# Altium PCB Porsche Brake Light.PcbDoc
Units mm, origin at the board's own origin, x right, y up, seen from the top; angles counter-clockwise.
Board outline 63 x 70 mm, 2 copper layers (Top Layer, Bottom Layer); 23 components, 14 nets, 98 pads, 42 vias.
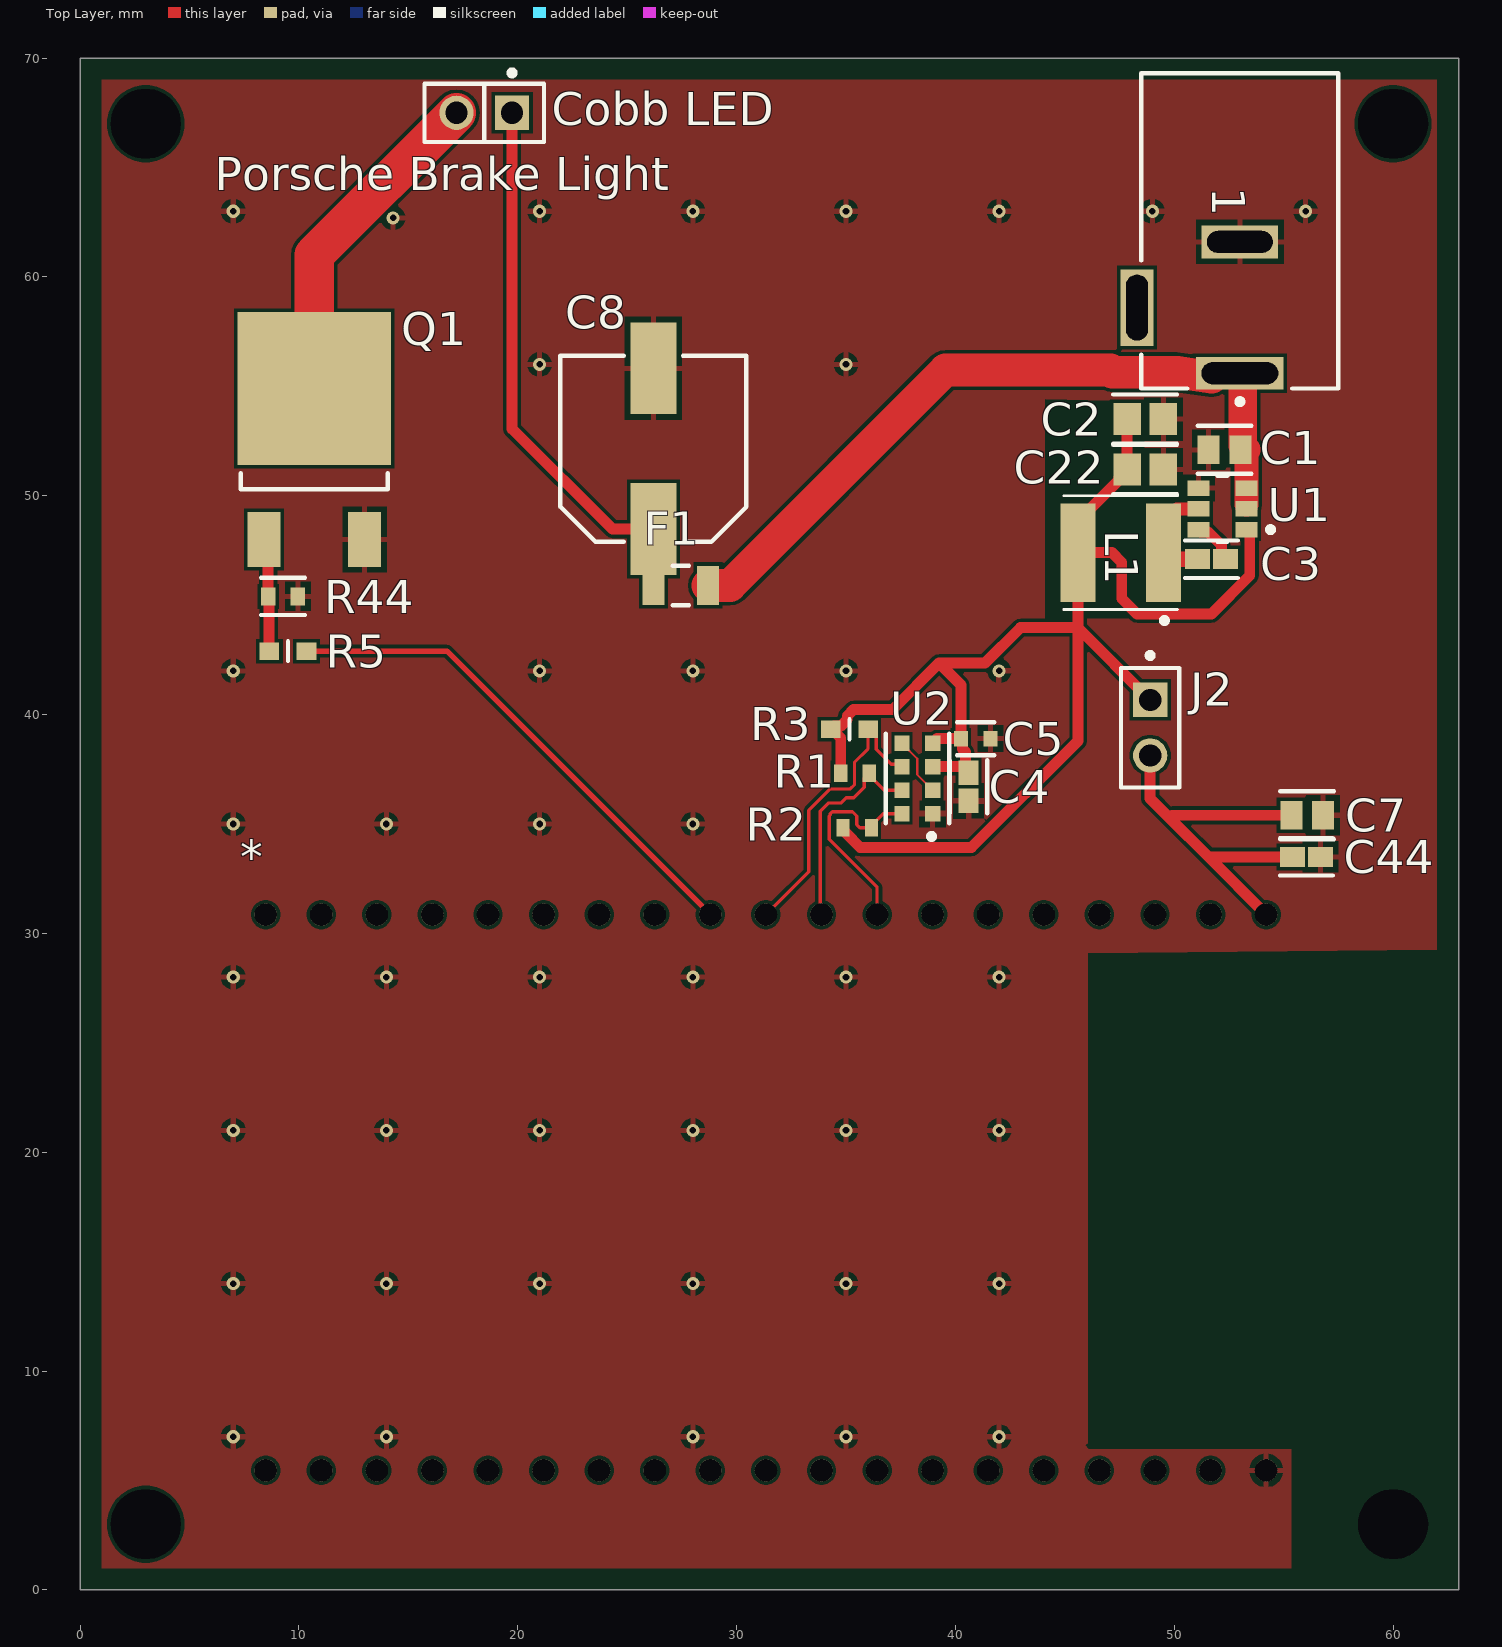
[diagram p0: Top Layer view]
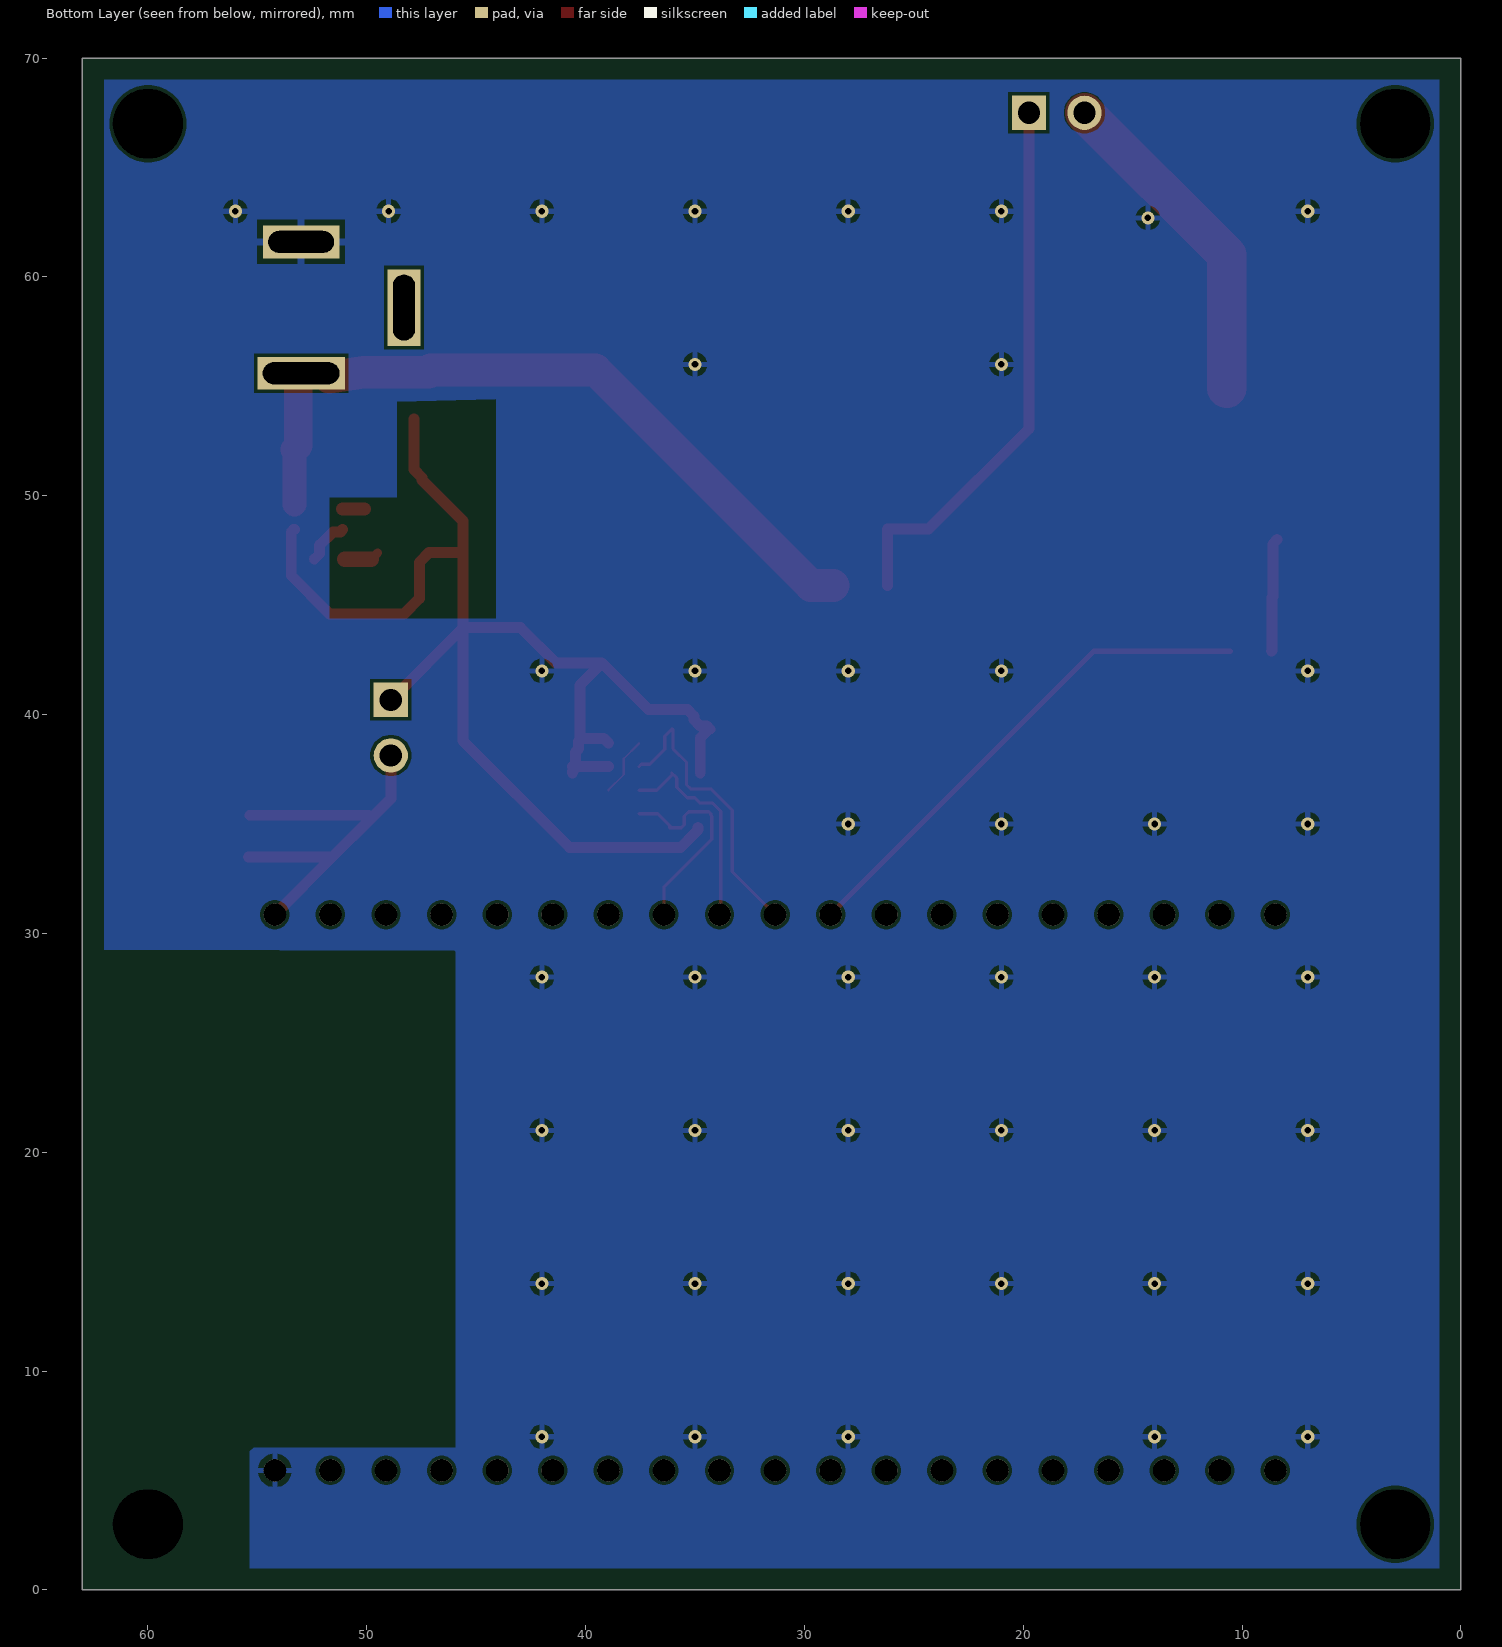
[diagram p1: Bottom Layer view, seen from below]
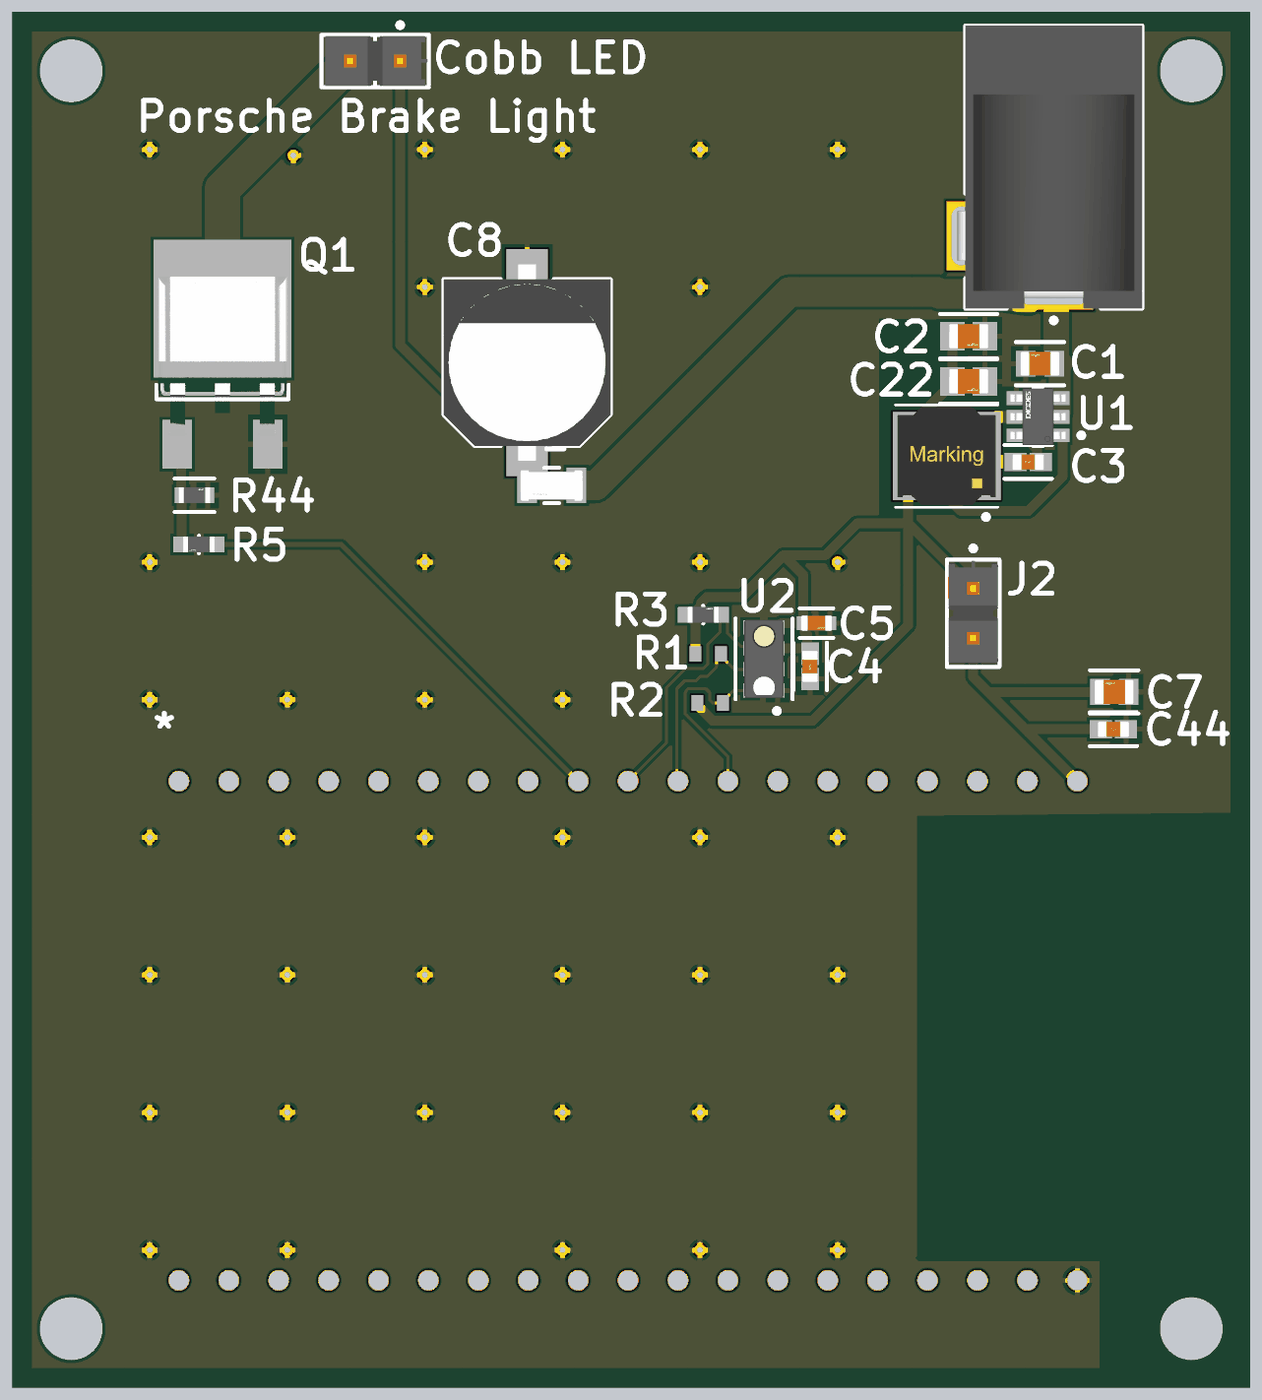
[diagram p2: 3D render of the assembled board from above, using the file's embedded part models]

## Layer stack, top to bottom
Top Solder: solder mask 0.0102, Solder Resist, Dk 3.5
Top Layer: signal copper 0.0356
Dielectric 1: dielectric 0.32, FR-4, Dk 4.8
Bottom Layer: signal copper 0.0356
Bottom Solder: solder mask 0.0102, Solder Resist, Dk 3.5

## Board outline
0,0 0,70 63,70 63,0

## Design rules (kind name [scope] priority, off if disabled: settings)
Clearance [All] p1: gap=0.15 ignorepadtopadclearanceinfootprint=FALSE
PolygonConnect [All] p1: connectstyle=Relief reliefconductorwidth=0.254 reliefentries=4 polygonreliefangle="90 Angle" airgapwidth=0.254
RoutingVias [All] p1: holewidth=0.711 width=1.27 viastyle="Through Hole" minholewidth=0.711 minwidth=1.27 maxholewidth=0.711 maxwidth=1.27
SolderMaskExpansion [All] p1: expansion=0.102 istentingtop=FALSE
SupplyNets "Schematic Supply Nets_2" [InNet('GND')] p1: voltage=0.000
SupplyNets "Schematic Supply Nets_1" [InNet('+12V')] p2: voltage=0.000
SupplyNets "Schematic Supply Nets" [InNet('+3.3V')] p3: voltage=0.000
Width "VCNL Pin 8" [InNet('NetMD1_27')] p1: maxlimit=0.25 minlimit=0.15 preferedwidth=0.2
Width "VNCL Pin 7" [InNet('NetMD1_33')] p2: maxlimit=0.25 minlimit=0.15 preferedwidth=0.2
Width "VCNL Pin 6" [InNet('NetMD1_36')] p3: maxlimit=0.25 minlimit=0.15 preferedwidth=0.2
Width VIN [InNet('+12V')] p4: maxlimit=1.5 minlimit=0.5 preferedwidth=0.8
Width VOUT [InNet('+3.3V')] p5: maxlimit=1.5 minlimit=0.5 preferedwidth=1
Width "SW node" [InNet('NetC3_1')] p6: maxlimit=1 minlimit=0.4 preferedwidth=0.6
30 further rules are at their usual default settings.

## Components (designator, comment, footprint, x,y, rotation, side; value= is the part's Value field where it differs from the comment)
1 "PJ-002A" CUI-PJ-002A_V 53,58.6 r90 top
* "ESP32-DEVKITC-VIE" ESP32-DEVKITC-VIE-Footprint-1 7.19,32.13 r270 top
C1 "GRM21BR61E106KA73L" FP-GRM21B-0_15-IPC_C 52.3,52.1 r180 top
C2 "GRM21BZ71A226ME15L" FP-GRM21B-0_2-e0_2_0_7-IPC_B 48.674,53.5 r0 top
C3 "C1608X7R1E104K080AA" FP-C1608-080-0_1-IPC_B 51.7,47.1 r0 top
C4 "C1608X7R1E104K080AA" FP-C1608-080-0_1-IPC_B 40.6,36.7 r90 top
C5 "GRM188R71A225KE15D" FP-GRM188-0_1-e0_2_0_5-MFG 40.925,38.9 r0 top
C7 "GRM21BR61E106KA73L" FP-GRM21B-0_15-IPC_C 56.074,35.4 r180 top
C8 "EEE-FK1E221P" PNSC-EEE-FK1E221P_N 26.2,52.15 r90 top
C22 "GRM21BZ71A226ME15L" FP-GRM21B-0_2-e0_2_0_7-IPC_B 48.674,51.2 r0 top
C44 "C1608X7R1E104K080AA" FP-C1608-080-0_1-IPC_B 56.041,33.5 r0 top
"Cobb LED" "TSW-102-14-G-S" FP-TSW-102-14-G-S-MFG 18.47,67.5 r180 top
F1 "TR/3216FF2-R" FP-3216FF-MFG 27.45,45.9 r180 top value=0.066Ω
J2 "TSW-102-07-G-S" FP-TSW-102-07-G-S-MFG 48.9,39.4 r270 top
L1 "74404052039" WE-LQS_5020 47.55,47.4 r0 top
Q1 "IRLR7843TRPBF" FP-PG-TO252-3-MFG 10.7,52.575 r0 top
R1 "RC0603FR-072K2L" RESC1608X55X25LL10T15 35.41,37.33 r0 top
R2 "RC0603FR-072K2L" RESC1608X55X25LL10T15 35.51,34.83 r0 top
R3 "RC0603FR-078K2L" FP-RC0603-0_55-MFG 35.16,39.33 r0 top
R5 "RC0603FR-07100RL" FP-RC0603-0_55-MFG 9.5,42.9 r180 top
R44 "RC0603FR-0710KL" FP-RC0603-0_55-IPC_C 9.273,45.4 r0 top
U1 "AP63203WU-7" FP-TSOT26-MFG 52.2,49.4 r180 top
U2 "VCNL4040M3OE" FP-VCNL4040M3OE-MFG 38.26,37.08 r0 top

## Footprints (in the part's own frame and the unit in brackets; to place one, negate y for a bottom-side part, rotate by r counter-clockwise, add the part's x,y. Pads: shape width x height; smd on the part's side, far side on the other; paste and mask are expansions set on the pad)
CUI-PJ-002A_V [mm] "THD, 3-Leads, Body 14.4x9mm, Height 11mm"
  rect 1.5x4 hole 1 slot 3.5 at 90 deg: 1(-3,0)
  rect 1.5x3.5 hole 1 slot 3 at 90 deg: 2(3,0)
  rect 3.5x1.5 hole 1 slot 3 at 0 deg: 3(0,4.7)
  silkscreen extent -4.42,-4.5 10.7,4.5, body extent -3.7,-4.5 10.7,4.9, height 11
ESP32-DEVKITC-VIE-Footprint-1 [mm]
  round 1.02 hole 1.02: 1(1.27,47.01) 2(1.27,44.47) 3(1.27,41.93) 4(1.27,39.39) 5(1.27,36.85) 6(1.27,34.31) 7(1.27,31.77) 8(1.27,29.23) 9(1.27,26.69) 10(1.27,24.15) 11(1.27,21.61) 12(1.27,19.07) 13(1.27,16.53) 14(1.27,13.99) 15(1.27,11.45) 16(1.27,8.91) 17(1.27,6.37) 18(1.27,3.83) 19(1.27,1.29) 20(26.67,47.01) 21(26.67,44.47) 22(26.67,41.93) 23(26.67,39.39) 24(26.67,36.85) 25(26.67,34.31) 26(26.67,31.77) 27(26.67,29.23) 28(26.67,26.69) 29(26.67,24.15) 30(26.67,21.61) 31(26.67,19.07) 32(26.67,16.53) 33(26.67,13.99) 34(26.67,11.45) 35(26.67,8.91) 36(26.67,6.37) 37(26.67,3.83) 38(26.67,1.29)
  body extent 0,0 27.94,48.26, height 15
FP-3216FF-MFG [mm]
  rect 1x1.8 smd paste+0 mask+0: 1(-1.25,0) 2(1.25,0)
  silkscreen extent -0.38,-0.9 0.37,0.9, body extent -1.85,-1 1.85,1, height 0.25
FP-C1608-080-0_1-IPC_B [mm]
  rect 1.131x0.912 smd paste+0 mask+0: 1(-0.641,0) 2(0.641,0)
  silkscreen extent -1.21,-0.86 1.21,0.86, body extent -1.46,-0.71 1.46,0.71, height 0.25
FP-GRM21B-0_2-e0_2_0_7-IPC_B [mm]
  rect 1.255x1.456 smd paste+0 mask+0: 1(-0.826,0) 2(0.826,0)
  silkscreen extent -1.45,-1.13 1.45,1.13, body extent -1.7,-0.98 1.7,0.98, height 0.25
FP-GRM21B-0_15-IPC_C [mm]
  rect 1.006x1.308 smd paste+0 mask+0: 1(-0.726,0) 2(0.726,0)
  silkscreen extent -1.23,-1.1 1.23,1.1, body extent -1.33,-0.8 1.33,0.8, height 0.25
FP-GRM188-0_1-e0_2_0_5-MFG [mm]
  rect 0.65x0.7 smd paste+0 mask+0: 1(-0.675,0) 2(0.675,0)
  silkscreen extent -0.85,-0.75 0.85,0.75, body extent -1.1,-0.55 1.1,0.55, height 0.25
FP-PG-TO252-3-MFG [mm]
  rect 1.5x2.5 smd paste+0 mask+0: 1(-2.3,-4.575) 3(2.3,-4.575)
  rect 7x7 smd paste+0 mask+0: 4(0,2.325)
  silkscreen extent -3.37,-2.29 3.36,-1.55, body extent -3.6,-5.92 3.6,5.92, height 0.25
FP-RC0603-0_55-IPC_C [mm]
  rect 0.659x0.812 smd paste+0 mask+0: 1(-0.677,0) 2(0.677,0)
  silkscreen extent -1.01,-0.85 1.01,0.85, body extent -1.11,-0.55 1.11,0.55, height 0.25
FP-RC0603-0_55-MFG [mm]
  rect 0.9x0.8 smd paste+0 mask+0: 1(-0.85,0) 2(0.85,0)
  silkscreen extent 0,-0.45 0,0.45, body extent -1.4,-0.55 1.4,0.55, height 0.25
FP-TSOT26-MFG [mm]
  rect 1x0.7 smd paste+0 mask+0: 1(-1.1,0.95) 2(-1.1,0) 3(-1.1,-0.95) 4(1.1,-0.95) 5(1.1,0) 6(1.1,0.95)
  silkscreen extent -2.33,-1.5 0.22,1.5, body extent -1.7,-1.6 1.7,1.6, height 0.25
FP-TSW-102-07-G-S-MFG [mm]
  rect 1.57x1.57 hole 1.02 paste-2539.97 mask+0: 1(-1.27,0)
  round 1.57 hole 1.02 paste-2539.97 mask+0: 2(1.27,0)
  silkscreen extent -3.42,-1.34 2.73,1.34, body extent -2.83,-1.44 2.83,1.44, height 0.25
FP-TSW-102-14-G-S-MFG [mm]
  rect 1.57x1.57 hole 1.02 paste-2539.97 mask+0: 1(-1.27,0)
  round 1.57 hole 1.02 paste-2539.97 mask+0: 2(1.27,0)
  silkscreen extent -2.73,-1.95 2.73,1.34, body extent -2.83,-1.44 2.83,1.44, height 0.25
FP-VCNL4040M3OE-MFG [mm]
  rect 0.7x0.725 smd paste+0 mask+0: 1(0.7,-1.612) 2(0.7,-0.538) 3(0.7,0.538) 4(0.7,1.613) 5(-0.7,1.613) 6(-0.7,0.538) 7(-0.7,-0.538) 8(-0.7,-1.612)
  silkscreen extent -1.45,-2.77 1.45,2.05, body extent -1.15,-2.15 1.15,2.15, height 0.25
PNSC-EEE-FK1E221P_N [mm] "CAPAE, 2-Leads, Body 8.5x8.5mm, IPC Medium Density"
  rect 4.2x2.1 smd: 1(-3.675,0) 2(3.675,0)
  silkscreen extent -4.25,-4.25 4.25,4.25, body extent -5,-4.25 5,4.25, height 10.5
RESC1608X55X25LL10T15 [mm] "Chip Resistor, 2-Leads, Body 1.60x0.80mm, IPC High Density"
  rect 0.6x0.8 smd: 1(-0.65,0) 2(0.65,0)
  body extent -0.85,-0.45 0.85,0.45, height 0.55
WE-LQS_5020 [mm] "SMD Power Inductor, 2-Leads, body 5x5mm"
  rect 1.6x4.5 smd: 1(1.95,0) 2(-1.95,0)
  silkscreen extent -2.6,-3.22 2.6,2.6, body extent -2.5,-2.5 2.5,2.5, height 2

## Part data
1: library part CMP-2000-06895-2, "Through Hole Right Angle DC Power Jack, 2.5 A, 2 mm Center Pin, 3 Position, -25 to 85 degC, RoHS, Bulk", Current Rating=2.5A, Flammability Rating=UL94V-0, Insulation Resistance=50MOhms, Manufacturer=CUIInc., Operating Temperature Range=-25Cto+85C, Package Description="3-Pin Through Hole Device, Body 14.4 x 9 mm, Height 11 mm", Voltage Rating=24V, Brand=CUI, Connector Type=DCPowerJack, Contact Gender=Male, Contact Material=Copper, Contact Plating=Nickel, Datasheet URL=http://www.cui.com/product/resource/pj-002a.pdf, Datasheet Version="Rev. 1.03, 04/2016", Factory Pack Quantity=500, Housing Material=PolybutyleneTerephthalate(PBT), Inside Contact Diameter=2mm, Manufacturer URL=http://www.cui.com/, Mounting Angle=Right, Mounting Style=ThroughHole, Mounting Technology=ThroughHole, Outside Contact Diameter=6.5mm, Package Reference=PJ-002A, Product=Jacks, Product Category=DCPowerConnectors, RoHS=True, Termination Style=ThroughHole
*: library part CMP-00025-00003-3, "ESP32-WROVER-IE Series Evaluation Board 802.11 b/g/n (WiFi, WLAN) Bluetooth Smart Ready 4.x Dual Mode"
C1 C7: library part CMP-2007-03541-2, "Chip Multilayer Ceramic Capacitors for General Purpose, 0805, 10uF, X5R, 15%, 10%, 25V", Capacitance=10uF, Case Code (Imperial)=0805, Case Code (Metric)=2012, Dielectric=X5R, Max Operating Temperature=85°C, Min Operating Temperature=-55°C, Package Quantity=1, Tolerance=10%, Voltage=25V, Case/Package=0805, Depth=1.25mm, Height=1.25mm, Lead Free="Lead Free", Length=2mm, Material=Ceramic, Mount="Surface Mount", Packaging="Tape and Reel", Radiation Hardening=No, Termination=SMD/SMT, Thickness=0.053inch, Voltage Rating=25V, Voltage Rating (DC)=25V, Width=0.049inch
C2 C22: library part CMP-06035-023072-1, "Chip Multilayer Ceramic Capacitors for General Purpose, 0805, 22uF, X7R, 15%, 20%, 10V"
C3 C4 C44: library part CMP-2000-05395-2, "Multilayer Ceramic Capacitors 100nF ±10% 25V X7R SMD 0603", Capacitance=100nF, Case Code (Imperial)=0603, Case Code (Metric)=1608, Dielectric=X7R, Dielectric Material=Ceramic, Max Operating Temperature=125°C, Min Operating Temperature=-55°C, Package Quantity=1, Tolerance=10%, Voltage=25V, Case/Package=0603, Construction=Flat, Depth=0.8mm, Height=0.8mm, Lead Free="Lead Free", Length=1.6mm, Mount="Surface Mount", Number of Pins=2, Packaging="Tape and Reel", Radiation Hardening=No, REACH SVHC="No SVHC", Resistor Type=Ceramic, RoHS Compliant=Yes, Series=C, Termination=SMD/SMT, Thickness=0.037inch, Voltage Rating=25V, Voltage Rating (DC)=25V, Weight=7.1E-05oz, Width=0.031inch
C5: library part CMP-2006-02836-2, "Chip Multilayer Ceramic Capacitors for General Purpose, 0603, 2.2uF, X7R, 15%, 10%, 10V", Capacitance=2.2uF, Case Code (Imperial)=0603, Case Code (Metric)=1608, Dielectric=X7R, Max Operating Temperature=125°C, Min Operating Temperature=-55°C, Package Quantity=1, Tolerance=10%, Voltage=10V, Case/Package=0603, Depth=0.8mm, Height=0.8mm, Lead Free="Lead Free", Length=1.6mm, Material=Ceramic, Mount="Surface Mount", Number of Pins=2, Packaging="Cut Tape", REACH SVHC="No SVHC", Termination=SMD/SMT, Thickness=0.035inch, Voltage Rating=10V, Voltage Rating (DC)=10V, Weight=7.1E-05oz, Width=0.031inch
C8: library part CMP-1665-00017-3, "Aluminum Electrolytic Capacitor, 220 uF, +/- 20%, 25 V, -55 to 105 degC, 2-Pin CAPAE, RoHS, Tape and Reel", Manufacturer=Panasonic, Max Operating Temperature="105 degC", Min Operating Temperature="-55 degC", Package Quantity=500, Voltage Rating="25 V", ComponentLink1Description="Manufacturer URL", ComponentLink1URL=http://www.panasonic.com/, ComponentLink2Description=Datasheet, ComponentLink2URL=http://industrial.panasonic.com/cdbs/www-data/pdf/RDE0000/ABA0000C1181.pdf, DatasheetVersion=03/2016, Height="10.2 mm", Lead Pitch="3.1 mm", Length="10.2 mm", Mount="Surface Mount", Mounting Technology="Surface Mount", PackageDescription="2-Pin Electrolytic Aluminum Capacitor, Body 8.3 x 8.3 mm", PackageReference=EEE-FK1E221P, Packaging="Tape and Reel", Pins=2, REACH SVHC="No SVHC", RoHSCompliant=true
"Cobb LED": library part CMP-02766-001740-1, "CONN HEADER VERT 2POS 2.54MM", Color=Black, Flammability Rating="UL94 V-0", Max Current Rating=7.6A, Max Operating Temperature=125°C, Max Voltage Rating (AC)=550V, Min Operating Temperature=-55°C, Package Quantity=1, Connector Type=Header, Contact Finish - Mating=GOLD, Contact Material=Bronze, Contact Mating Length=0.32inch, Contact Plating=Gold, Contact Shape=Square, Contact Type="Male Pin", Depth=2.54mm, Fastening Type=Pull, Gender=Male, Housing Color=Black, Housing Material=Polyester, Insulation Color=Black, Insulation Material=PBT, Lead Free="Lead Free", Length=5.08mm, Mount="Through Hole", Number of Contacts=2, Number of Positions=2, Number of Rows=1, Orientation=Straight, Packaging=Bulk, Pitch=2.54mm, Radiation Hardening=No, REACH SVHC="No SVHC", RoHS Compliant=Yes, Series=TSW, Termination=Solder, Width=2.54mm
F1: library part CMP-31519-000001-1, "FUSE BRD MNT 2A 32VAC 63VDC 1206", Fuse Current=2A, Fuse Interrupt Ac Current=50A, Manufacturer="Cooper Bussmann", Max Fuse Ac Voltage=32V, Max Fuse Dc Voltage=63V, Package=3216FF, Resistance=0.066Ω, Temperature="-55°C to +125°C", Temperature Range High=+125°C, Temperature Range Low=-55°C, Automotive=Yes, Automotive Grade="Grade 1", Category=Fuse, ComponentLink2Description=Datasheet, ComponentLink2URL=https://www.eaton.com/content/dam/eaton/products/electronic-components/resources/data-sheet/eaton-3216ff-surface-mount-fuse-data-sheet.pdf, Device Class L1="Circuit Protection", Device Class L2=Fuses, Device Class L3=unset, Digikey Description="FUSE BRD MNT 2A 32VAC 63VDC 1206", Fuse Blow Speed=Fast, Fuse I2T=0.126A2Sec, Fuse Interrupt Dc Current=50A, Height=1.09mm, Ipc Land Pattern Name=CAPC320160X89, Lead Free=Yes, Manufacturer Part Number=TR/3216FF2-R, Mouser Description="Surface Mount Fuses 32VAC/DC 2A Fast Acting Chip Fuse", Octopart=https://octopart.com/tr%2F3216ff2-r-cooper+bussmann-8723903, RoHS=TRUE
J2: library part CMP-02766-000084-1, "CONN HEADER VERT 2POS 2.54MM", Current Rating=6.3A, Manufacturer=Samtec, Temperature="-55°C to +125°C", Temperature Range High=+125°C, Temperature Range Low=-55°C, Voltage Rating=550V, Automotive=No, Category=Conn, ComponentLink2Description=Datasheet, ComponentLink2URL=http://suddendocs.samtec.com/catalog_english/tsw_th.pdf, Conn Gender=Male, Conn Orientation=Straight, Contact Material=Gold,Nickel, Device Class L1=Connectors, Device Class L2="Headers and Wire Housings", Device Class L3=unset, Digikey Description="CONN HEADER VERT 2POS 2.54MM", Footprint Url=http://suddendocs.samtec.com/prints/tsw-xxx-xx-x-x-xx-xxx-footprint.pdf, Height=8.71mm, Lead Free=Yes, Manufacturer Part Number=TSW-102-07-G-S, Mouser Description="Conn Unshrouded Header HDR 2 POS 2.54mm Solder ST Thru-Hole Automotive Bulk", Number of Contacts=2, Number of Rows=1, Octopart=https://octopart.com/tsw-102-07-g-s-samtec-272197, Package=TSW-102-07-G-S, Pitch=2.54mm, RoHS=TRUE
L1: library part CMP-03913-61645215-2, "Power Inductor, Aec-Q200, 3.9Uh, 2.4A Rohs Compliant: Yes", Ambient Temperature Range High=85°C, Ambient Temperature Range Low=-40°C, Case/Package=Nonstandard, Current Rating=2.4A, DC Resistance (DCR)=50.5mΩ, Inductance=3.9µH, Max Operating Temperature=125°C, Saturation Current=2.8A, Self Resonant Frequency=62MHz, Test Frequency=100kHz, Tolerance=30%, Composition=Wirewound, Height=2mm, Height - Seated (Max)=2.0066mm, Length=5mm, Min Operating Temperature=-40°C, Mount="Surface Mount", Packaging="Tape & Reel (TR)", RoHS=Compliant, Shielding=Shielded, Width=5mm
Q1: library part CMP-32901-000143-1, "MOSFET N-CH 30V 161A DPAK", Continuous Drain Current=161A, Drain To Source Breakdown Voltage=30V, Drain To Source Resistance=3.2mΩ, Gate To Source Voltage=20V, Input Capacitace At Vds="4380pF @ 15V", Manufacturer=Infineon, Max Forward Diode Voltage=1V, Max Junction Temp=+175°C, Package=PG-TO252-3, Power Dissipation=140W, Pulse Drain Current=620A, Temperature="-55°C to +175°C", Temperature Range Low=-55°C, Automotive=No, Category=Trans, ComponentLink2Description=Datasheet, ComponentLink2URL=https://www.infineon.com/dgdl/irlr7843pbf.pdf?fileId=5546d462533600a40153566de53526d8, Depletion Mode=False, Device Class L1="Discrete Semiconductors", Device Class L2=Transistors, Device Class L3=MOSFETs, Digikey Description="MOSFET N-CH 30V 161A DPAK", Drain To Source Voltage=30V, Footprint Url=https://www.infineon.com/cms/en/product/packages/PG-TO252/PG-TO252-3-901/, Gate Charge At Vgs="34nC @ 4.5V", Height=2.52mm, Lead Free=Yes, Manufacturer Part Number=IRLR7843TRPBF, Number Of Channels=1, Number Of N Channels=1, Octopart=https://octopart.com/irlr7843trpbf-infineon-65875062, Reverse Recovery Charge=36nC, Reverse Recovery Time=39ns, RoHS=TRUE, Rthja Max=50°C/W, Temperature Range High=+175°C, Threshold Vgs Max=2.3V, Threshold Vgs Min=1.4V, Turn Off Delay Time=34ns, Turn On Delay Time=25ns
R1 R2: library part CMP-2000-06934-1, "Thick Film Resistor, 2.2 KOhm, 100 mW, 50 V, +/- 1%, -55 to 155 degC, 2-Pin SMD (0603), RoHS, Tape and Reel", Case Code - in=0603, Case Code - mm=1608, Manufacturer=Yageo, Operating Temperature Range=-55Cto+155C, Package Description="2-Pin Surface Mount Device, Body 1.6 x 0.8 mm", Power Rating=100mW, Resistance=2.2kOhms, Temperature Coefficient=100PPM/C, Tolerance=1%, Voltage Rating=50V, Datasheet URL=http://www.yageo.com/documents/recent/PYu-RC_Group_51_RoHS_L_7.pdf, Datasheet Version="Rev. 7, 05/2017", Manufacturer URL=http://www.yageo.com/, Mounting Technology=SurfaceMount, Package Reference=0603, Packaging=Reel, Product=ThickFilmResistorsGeneralPurpose, Series=RC, Termination Style=SMD/SMT
R3: library part CMP-1659-00040-2, Case Code (Imperial)=0603, Case Code (Metric)=1608, Max Operating Temperature=155°C, Max Power Dissipation=100mW, Min Operating Temperature=-55°C, Resistance=8.2kΩ, Temperature Coefficient=100ppm/°C, Tolerance=1%, Voltage Rating=50V, Case/Package=0603, Composition="Thick Film", Depth=800µm, Features="Moisture Resistant", Height=450µm, Lead Free="Lead Free", Lead Pitch=300µm, Length=1.6mm, Military Standard=Not, NexarPartId=40301092, Number of Pins=2, Number of Terminations=2, Packaging="Tape & Reel", Power Rating=100mW, REACH SVHC="No SVHC", RoHS=Compliant, Schedule B="8533210045, 8533210045", Termination=SMD/SMT, Voltage Rating (AC)=50V, Voltage Rating (DC)=50V, Width=800µm
R5: library part CMP-2100-03663-2, Case Code (Imperial)=0603, Max Operating Temperature=155°C, Min Operating Temperature=-55°C, Power Rating=100mW, Resistance=100Ω, Temperature Coefficient=100ppm/°C, Tolerance=1%, Voltage Rating=50V, Case Code (Metric)=0603, Case/Package=0603, Composition="Thick Film", Depth=800µm, Height=450µm, Lead Free="Lead Free", Length=1.6mm, Military Standard=Not, NexarPartId=55402879, Number of Pins=2, Packaging="Tape & Reel", REACH SVHC=Unknown, RoHS=Compliant, Schedule B="8533210045, 8533210045", Termination=SMD/SMT, Voltage Rating (DC)=50V, Width=800µm
R44: library part CMP-2100-03664-2, "RES 10K OHM 1% 1/10W 0603", Case Code (Imperial)=0603, Case Code (Metric)=1608, Max Operating Temperature=155°C, Max Power Dissipation=100mW, Min Operating Temperature=-55°C, Resistance=10kR, Resistance Tolerance=1%, Resistor Type="Thick Film", Temperature Coefficient=100ppm/°C, Voltage Rating=75V, Voltage Rating (DC)=50V, Case/Package=0603, Construction=Rectangular, Depth=0.8mm, Features="Moisture Resistant", Height=0.45mm, Lead Free="Lead Free", Lead Pitch=0.3mm, Length=1.6mm, Military Standard=Not, Number of Pins=2, Number of Terminations=2, Packaging="Tape and Reel", Power Rating=100mW, RoHS Compliant=Yes, Series=RC, Size Code=0603, Termination=SMD/SMT, Tolerance=1%, Weight=7.1E-05oz, Width=0.8mm
U1: library part CMP-12757-000006-1, "IC REG BUCK 3.3V 2A TSOT26", Ambient Temperature Range High=+85°C, Ambient Temperature Range Low=-40°C, Manufacturer="Diodes Inc.", Max Junction Temp=+160°C, Max Supply Voltage=32V, Min Supply Voltage=3.8V, Nominal Supply Current=22uA, Output Current=2A, Output Voltage=3.3V, Package=TSOT26, Switching Frequency=1.1MHz, Temperature="to +160°C", Automotive=No, Category=IC, ComponentLink2Description=Datasheet, ComponentLink2URL=https://www.diodes.com/assets/Datasheets/AP63200-AP63201-AP63203-AP63205.pdf, Device Class L1="Integrated Circuits (ICs)", Device Class L2="Power Management ICs", Device Class L3="Voltage Regulators - Switching", Digikey Description="IC REG BUCK 3.3V 2A TSOT26", Footprint Url=https://www.diodes.com/assets/Package-Files/TSOT26.pdf, Height=1mm, Lead Free=Yes, Manufacturer Part Number=AP63203WU-7, Mouser Description="AP63203 Series 3.3 V 2 A SMT Fixed Low IQ Synchronous Buck - TSOT-26", Number Of Outputs=1, Octopart=https://octopart.com/ap63203wu-7-diodes+inc.-98099550, Output Type=Fixed, RoHS=TRUE, Standoff Height=0.01mm, Switching Topology=Buck, Temperature Range High=+160°C
U2: library part CMP-02530-000002-1, "SENSOR OPT 550NM AMBIENT 8SMD", Ambient Temperature Range High=+85°C, Ambient Temperature Range Low=-40°C, Manufacturer=Vishay, Max Supply Voltage=3.6V, Min Supply Voltage=2.5V, Operating Supply Current=0.2-300uA, Package=0, Temperature="-40°C to +85°C", Automotive=No, Category=IC, ComponentLink2Description=Datasheet, ComponentLink2URL=https://www.vishay.com/docs/84274/vcnl4040.pdf, Device Class L1=Sensors, Device Class L2="Optical Sensors", Device Class L3=unset, Digikey Description="SENSOR OPT 550NM AMBIENT 8SMD", Height=1.15mm, Lead Free=Yes, Manufacturer Part Number=VCNL4040M3OE, Octopart=https://octopart.com/vcnl4040m3oe-vishay-56243155, RoHS=TRUE, Sensor Output=I2C, Temperature Range High=+85°C, Temperature Range Low=-40°C

## Free pads (board coordinates)
  round 1.02 hole 3.2 unplated: 93(3,67) 93(60,67) 94(60,3) 95(3,3)

## Via types
v1: diameter 0.6, hole 0.3, Top Layer to Bottom Layer, 42 vias

## Nets (pads, with @x,y where several pads share a name; then routed paths per layer and width w, separated by ;. In a path a pad name is that pad's centre, name@x,y a point inside that pad or via, vN(x,y) a via of type N, cw(c..) or ccw(c..) an arc to the next point about the centre after c; other vN are vias at no path point)
+3.3V: C2.1 C4.2 C5.1 C22.1 J2.1 L1.2 R1.1 R2.1 R3.1 U1.1 U2.3 U2.4 | length 70.4
  Top Layer w0.5: R1.1 34.76,38.93 34.36,39.33 R3.1 34.46,39.48 34.763,39.48 35.056,39.773 35.056,39.939 35.351,40.234 37.134,40.234 39.25,42.35 ; R2.1 34.86,34.73 35.298,34.292 35.298,34.28 35.651,33.926 40.726,33.926 45.6,38.8 45.6,43.97 ; U2.3 40.394,37.618 40.6,37.411 C4.2 ; U2.4 38.96,38.705 39.155,38.9 C5.1 40.25,41.35 39.25,42.35 ; C5.1@40.25,38.875 40.325,38.8 40.325,38.428 40.465,38.288 40.465,37.656 40.504,37.618 C4.2@40.6,37.618 ; C2.1 C22.1 47.471,50.823 47.471,50.721 45.6,48.85 L1.2 ; J2.1 45.6,43.97 ; U1.1 53.35,48.45 53.45,48.35 53.45,46.35 51.7,44.6 48.3,44.6 47.6,45.3 47.6,46.95 47.15,47.4 L1.2 ; 39.25,42.35 41.36,42.35 42.98,43.97 45.6,43.97 ; 45.6,43.97 L1.2
+12V: 1.1 C1.1 F1.1 U1.2 U1.3 | length 33.2
  Top Layer w1.1: U1.2@53.3,49.6 U1.3 C1.1@53.3,52.096
  Top Layer w1.3: 47.226,55.646 47.326,55.746 ; 1.1 53.026,55.6 53.126,55.5 C1.1@53.126,52.274 ; C1.1@53.295,52.1 C1.1@53.3,52.096
  Top Layer w1.5: F1.1 29.7,45.9 39.546,55.746 47.084,55.746 47.184,55.646 47.226,55.646 50.147,55.646 1.1@51.7,55.415
GND: 1.2 *.20 C1.2 C2.2 C4.1 C5.2 C7.1 C8.2 C22.2 C44.2 Q1.3 R44.2 U1.4 U2.1
  other v1: 7,7 14,7 28,7 35,7 42,7 7,14 14,14 21,14 28,14 35,14 42,14 7,21 14,21 21,21 28,21 35,21 42,21 7,28 14,28 21,28 28,28 35,28 42,28 7,35 14,35 21,35 28,35 7,42 21,42 28,42 35,42 42,42 21,56 35,56 14.305,62.695 7,63 21,63 28,63 35,63 42,63 49,63 56,63
Net*_1: *.1 C7.2 C44.1 J2.2 | length 18.9
  Top Layer w0.5: J2.2 48.9,36.16 49.78,35.28 ; *.1 51.58,33.48 ; C7.2 49.9,35.4 49.78,35.28 ; C44.1 51.6,33.5 51.58,33.48 ; 49.78,35.28 51.58,33.48
Net*_8: *.8 R2.2 U2.8 | length 9.7
  Top Layer w0.15: *.8 36.42,32.105 34.231,34.294 34.231,35.366 34.284,35.419 34.284,35.464 34.379,35.559 35.296,35.559 35.489,35.366 35.489,34.976 35.635,34.83 R2.2 36.16,34.93 36.698,35.468 U2.8
Net*_9: *.9 R1.2 U2.7 | length 9.7
  Top Layer w0.15: *.9 33.827,30.913 33.827,35.578 34.212,35.963 34.783,35.963 35.017,36.197 35.364,36.197 35.793,36.626 35.793,36.63 35.835,36.672 35.835,37.105 R1.2 ; R1.2@36.06,37.23 36.747,36.542 U2.7
Net*_10: *.10 R3.2 U2.6 | length 13.5
  Top Layer w0.15: *.10 33.296,32.816 33.296,35.619 34.278,36.601 35.196,36.601 35.389,36.794 35.389,37.824 36.01,38.445 R3.2 36.06,39.33 36.385,39.005 36.385,38.415 37.073,37.727 37.45,37.727 U2.6
Net*_11: *.11 R5.1 | length 23.2
  Top Layer w0.25: R5.1@10.55,42.9 16.76,42.9 *.11
NetC3_1: C3.1 L1.1 U1.5 | length 2.6
  Top Layer w0.4: L1.1 L1.1@49.8,47.1
  Top Layer w0.6: L1.1@50.1,49.4 U1.5
  Top Layer w0.7: L1.1@49.8,47.1 C3.1@51,47.1
NetC3_2: C3.2 U1.6 | length 2.1
  Top Layer w0.5: U1.6 51.2,48.35 51.55,48.35 52.15,47.75 52.15,47.35 C3.2@52.4,47.1
NetC8_1: "Cobb LED.1" C8.1 F1.2 | length 25.4
  Top Layer w0.5: 19.74,67.5 19.74,53.06 24.325,48.475 C8.1 F1.2
"NetCobb LED_2": "Cobb LED.2" Q1.4 | length 15.3
  Top Layer w1.8: Q1.4 10.7,61 17.2,67.5
NetQ1_1: Q1.1 R5.2 R44.1 | length 5.2
  Top Layer w0.5: Q1.1 8.597,47.803 R44.1 8.623,45.373 8.623,42.927 R5.2
NetU2_2: U2.2 U2.5 | length 2.7
  Top Layer w0.1: U2.5 37.56,38.68 38.26,37.98 38.26,37.255 38.96,36.555 U2.2
pads on no net: 1.3 *.2 *.3 *.4 *.5 *.6 *.7 *.12 *.13 *.14 *.15 *.16 *.17 *.18 *.19 *.21 *.22 *.23 *.24 *.25 *.26 *.27 *.28 *.29 *.30 *.31 *.32 *.33 *.34 *.35 *.36 *.37 *.38

## Polygon pours and split planes (outlines as drawn)
GND on Bottom Layer "GND_L02_P001" (solid, pour order 1): 1,69 62,69 62,1 1,1
GND on Top Layer "GND_L01_P000" (solid, pour order 0): 1,69 62,69 62,1 1,1

## Other copper
Top Layer:
  pour cut-out: 44.1,54.4 44.1,44.4 44.4,44.4 51.7,44.4 51.7,49.9 48.6,49.9 48.6,54.3
  pour cut-out: 46.038,29.101 46.038,6.7 45.938,6.6 46.101,6.438 55.338,6.438 55.338,0 63,0 63,29.262
Bottom Layer:
  pour cut-out: 44.1,54.4 44.1,44.4 51.7,44.4 51.7,49.9 48.6,49.9 48.6,54.3
  pour cut-out: 45.985,29.215 45.938,29.167 45.938,6.5 55.175,6.5 55.338,6.338 55.338,0 63.1,0 62.968,0.132 62.968,29.262

## Silkscreen, mask and mechanical layers (free items; w line width, h text height)
Top Overlay:
  text "Porsche Brake Light" at 6.154,63.962 h1.52
Mechanical 1:
  the board outline again, w0.254